# Altium PCB MicrophoneArray.Main.PcbDoc
Units mm, origin at the board's own origin, x right, y up, seen from the top; angles counter-clockwise.
Board outline 40 x 84 mm, 2 copper layers (Top Layer, Bottom Layer); 51 components, 49 nets, 162 pads, 157 vias.
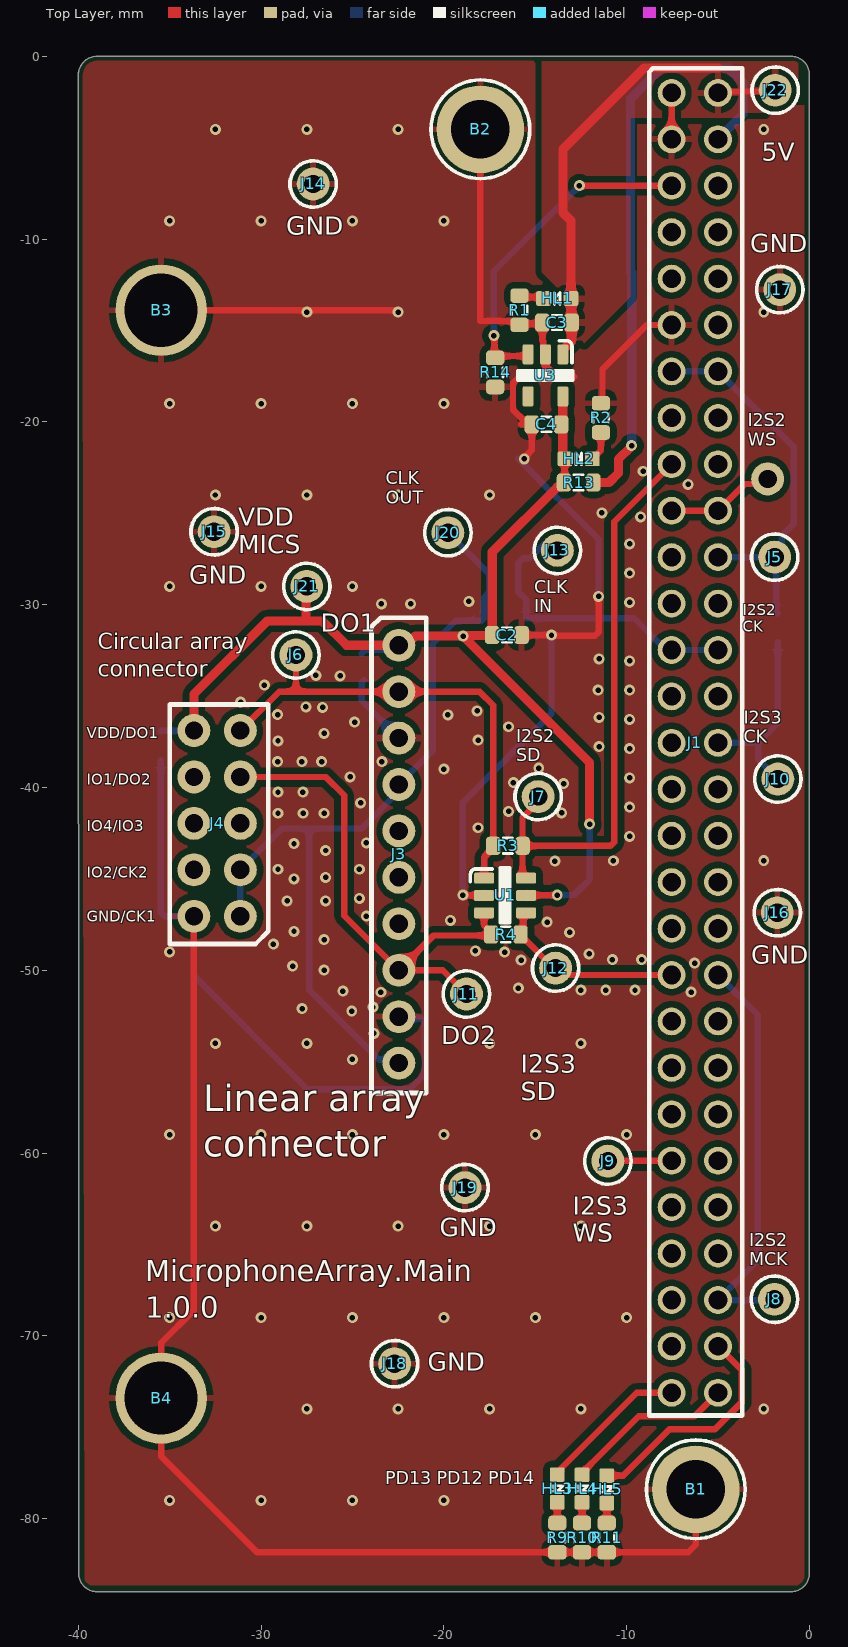
[diagram p0: Top Layer view]
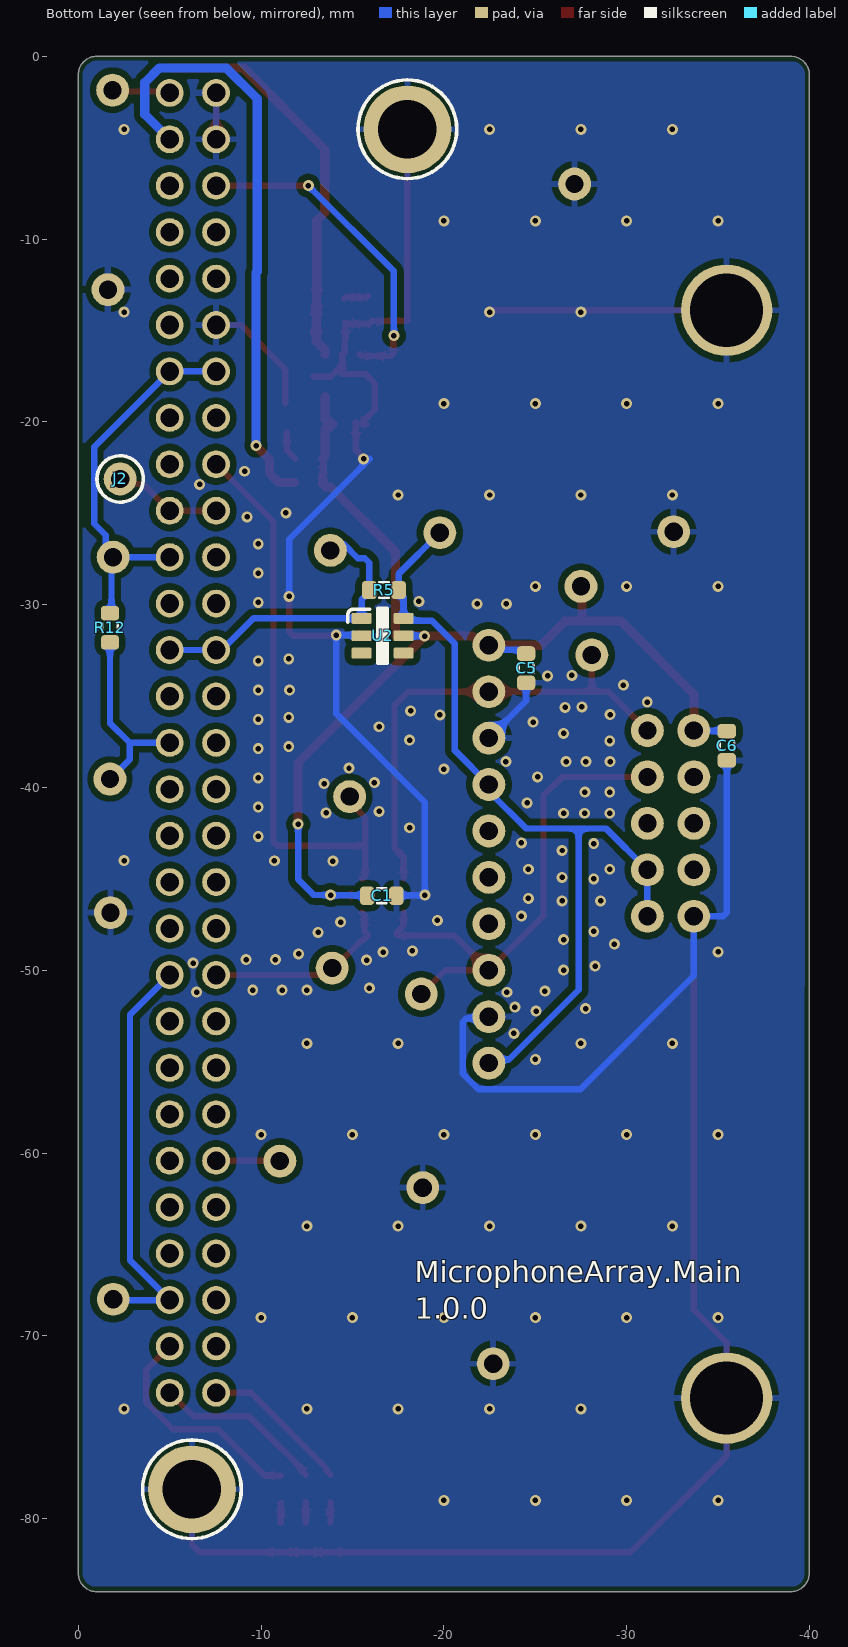
[diagram p1: Bottom Layer view, seen from below]
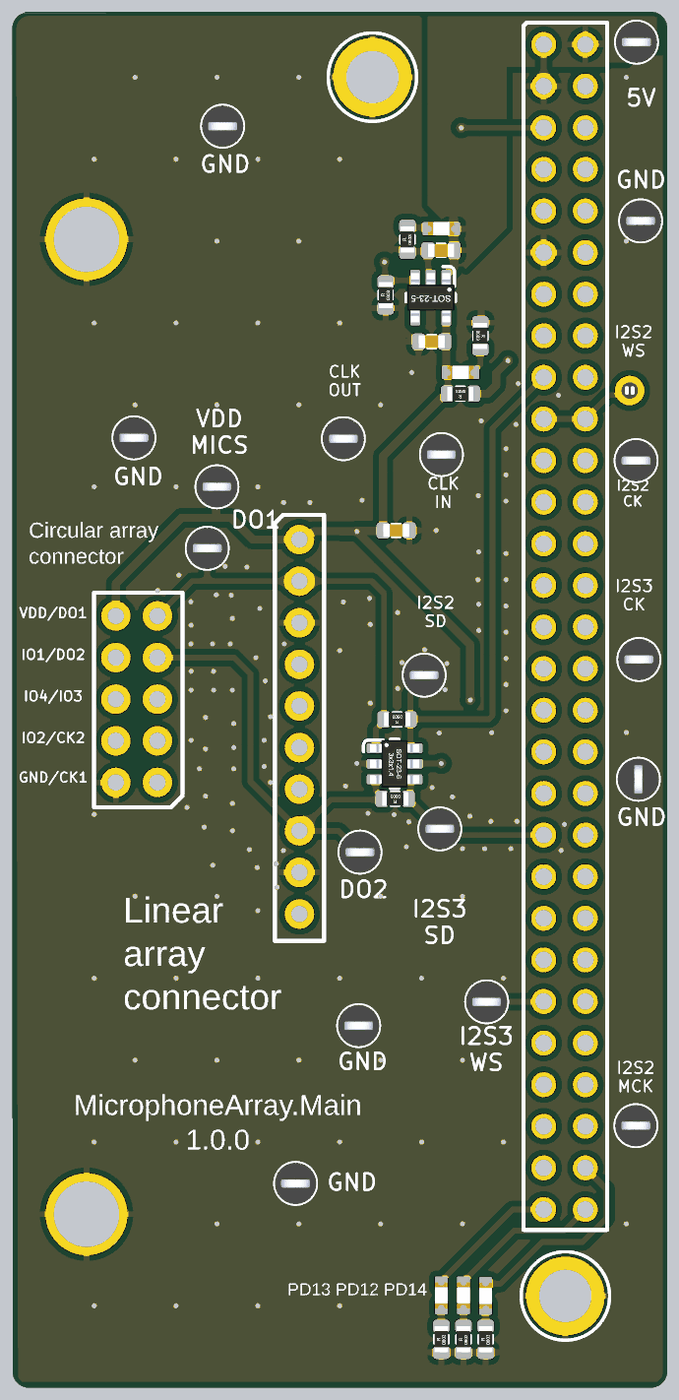
[diagram p2: 3D render of the assembled board from above, using the file's embedded part models]
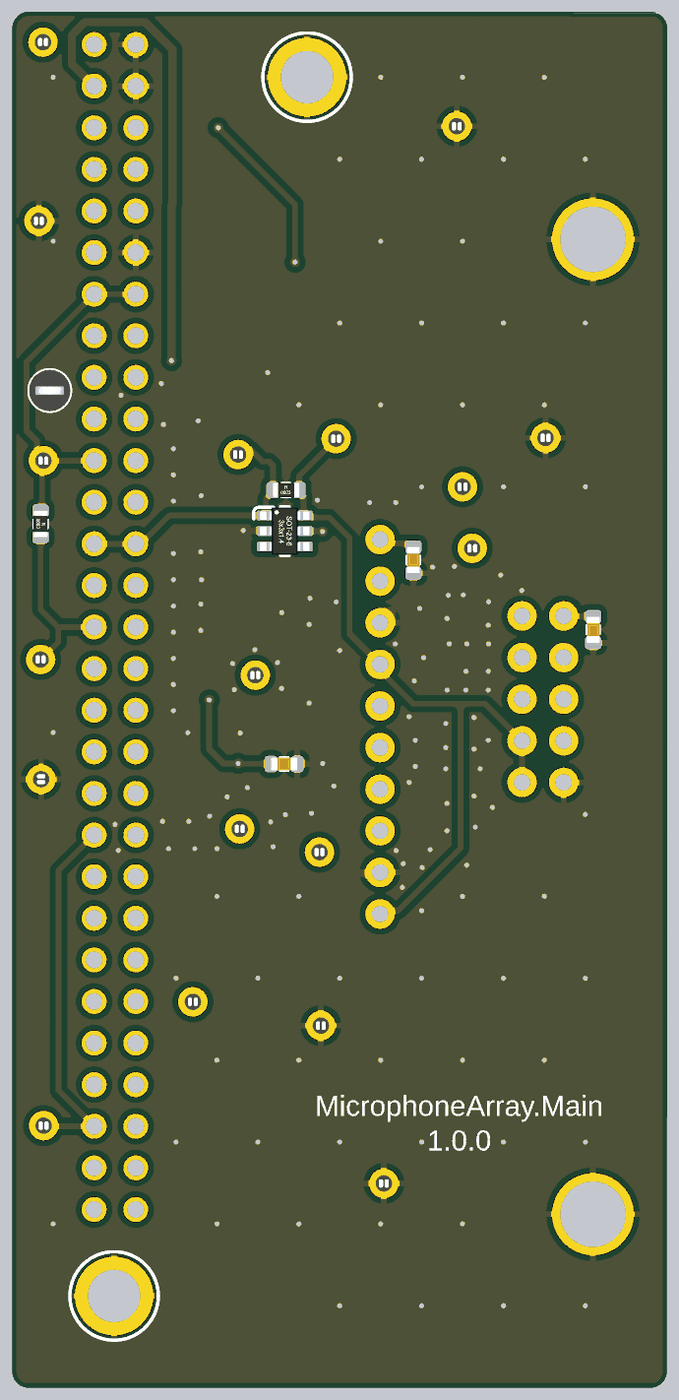
[diagram p3: 3D render of the assembled board from below, using the file's embedded part models]

## Layer stack, top to bottom
Top Solder: solder mask 0.0102, Solder Resist, Dk 3.5
Top Layer: signal copper 0.0356
Dielectric 1: dielectric 0.32, FR-4, Dk 4.8
Bottom Layer: signal copper 0.0356
Bottom Solder: solder mask 0.0102, Solder Resist, Dk 3.5

## Board outline
-39.981,-83 ccw(c-38.981,-83) -38.981,-84 -1,-84 ccw(c-1,-83) 0,-83 0,-1 ccw(c-1,-1) -1,0 -38.951,0 ccw(c-38.976,-1.025) -40,-1

## Design rules (kind name [scope] priority, off if disabled: settings)
AcuteAngle [All] p1: minimum=3.50000000000000E+0001 checktracksonly=FALSE
BoardOutlineClearance "BoardOutlineClearance 1" [All] p1: gap=0.25 ignorepadtopadclearanceinfootprint=FALSE except(0: Arc-SplitContinuation Track-SplitContinuation SMDPad-SplitContinuation THPad-SplitContinuation Via-SplitContinuation Fill-SplitContinuation Poly-SplitContinuation Region-SplitContinuation Text-SplitContinuation) // Milling
BoardOutlineClearance "BoardOutlineClearance 2" [All] p2: gap=0.4 ignorepadtopadclearanceinfootprint=FALSE except(0: Arc-SplitContinuation Track-SplitContinuation SMDPad-SplitContinuation THPad-SplitContinuation Via-SplitContinuation Fill-SplitContinuation Poly-SplitContinuation Region-SplitContinuation Text-SplitContinuation) // V-Cut
Clearance "Clearance 3 Oz" [All] p1: gap=0.35 ignorepadtopadclearanceinfootprint=FALSE except(0.25: Arc-Hole Track-Hole SMDPad-Hole THPad-Hole Via-Hole Fill-Hole Poly-Hole Region-Hole Text-Hole)
Clearance "Clearance 2 Oz" [All] p2: gap=0.3 ignorepadtopadclearanceinfootprint=FALSE except(0.25: Arc-Hole Track-Hole SMDPad-Hole THPad-Hole Via-Hole Fill-Hole Poly-Hole Region-Hole Text-Hole)
Clearance "Clearance-1 1 Oz" [All] p3: gap=0.2 ignorepadtopadclearanceinfootprint=FALSE except(0.25: Arc-Hole Track-Hole SMDPad-Hole THPad-Hole Via-Hole Fill-Hole Poly-Hole Region-Hole Text-Hole) // Standart
Clearance "Clearance-2 1 Oz" [All] p4: gap=0.15 ignorepadtopadclearanceinfootprint=FALSE except(0.2: Arc-Fill Arc-Poly Track-Fill Track-Poly SMDPad-Fill SMDPad-Poly THPad-Fill THPad-Poly Via-Fill Via-Poly Fill-Fill Fill-Poly Poly-Poly; 0.25: Arc-Hole Track-Hole SMDPad-Hole THPad-Hole Via-Hole Fill-Hole Poly-Hole Region-Hole Text-Hole) // Advance
Clearance "Clearance-1 1/2 Oz" [All] p5: gap=0.125 ignorepadtopadclearanceinfootprint=FALSE except(0.2: Arc-Fill Arc-Poly Track-Fill Track-Poly SMDPad-SMDPad SMDPad-Fill SMDPad-Poly THPad-Fill THPad-Poly Via-Fill Via-Poly Fill-Fill Fill-Poly Poly-Poly Poly-Region Poly-Text; 0.25: Arc-Hole Track-Hole SMDPad-Hole THPad-Hole Via-Hole Fill-Hole Poly-Hole Region-Hole Text-Hole) // Standart
Clearance "Clearance-2 1/2 Oz" [All] p6: gap=0.1 ignorepadtopadclearanceinfootprint=FALSE except(0.15: Arc-Fill Arc-Poly Track-Fill Track-Poly SMDPad-SMDPad SMDPad-Fill SMDPad-Poly THPad-Fill THPad-Poly Via-Fill Via-Poly Fill-Fill Fill-Poly Poly-Poly Poly-Region Poly-Text; 0.25: Arc-Hole Track-Hole SMDPad-Hole THPad-Hole Via-Hole Fill-Hole Poly-Hole Region-Hole Text-Hole) // Advance
DiffPairsRouting "DiffPairsRouting 1 Oz" [All] p1: maxlimit=0.254 minlimit=0.2 mostfreqgap=0.254 toplayer_minwidth=0.2 toplayer_maxwidth=0.381 toplayer_prefwidth=0.381 bottomlayer_minwidth=0.2 bottomlayer_maxwidth=0.381 bottomlayer_prefwidth=0.381 maxuncoupledlength=12.7
DiffPairsRouting "DiffPairsRouting 1/2 Oz" [All] p2: maxlimit=0.254 minlimit=0.1 mostfreqgap=0.254 toplayer_minwidth=0.1 toplayer_maxwidth=0.381 toplayer_prefwidth=0.381 bottomlayer_minwidth=0.1 bottomlayer_maxwidth=0.381 bottomlayer_prefwidth=0.381 maxuncoupledlength=12.7
HoleSize "Minimum HoleSize" [IsPad] p1: absolutevalues=TRUE maxlimit=5.9 minlimit=0.6 maxpercent=80.000 minpercent=20.000
HoleSize "Minimum HoleSize VIA 1" [IsVia] p2: absolutevalues=TRUE maxlimit=5.9 minlimit=0.3 maxpercent=80.000 minpercent=20.000 // Standart
HoleSize "Minimum HoleSize VIA 2" [IsVia] p3: absolutevalues=TRUE maxlimit=5.9 minlimit=0.2 maxpercent=80.000 minpercent=20.000 // Advance
HoleToHoleClearance Hole2HoleClearance [All] p1: gap=0.25 allowstackedmicrovias=FALSE
MinimumAnnularRing "Minimum AR VIA Standart" [IsVia] p1: minimumring=0.15
MinimumAnnularRing "Minimum AR PAD Standart" [IsPAD] p2: minimumring=0.2
MinimumAnnularRing "Minimum AR VIA Advance" [IsVia] p3: minimumring=0.1
MinimumAnnularRing "Minimum AR PAD Advance" [IsPAD] p4: minimumring=0.15
MinimumSolderMaskSliver "SolderMask Bridge Standart" [All] p1: minsoldermaskwidth=0.15 // All Masks
MinimumSolderMaskSliver "SolderMask Bridge Advance" [All] p2: minsoldermaskwidth=0.1 // Mask LDI
PlaneClearance "PlaneClearance 3 Oz" [All] p1: clearance=0.35
PlaneClearance "PlaneClearance 2 Oz" [All] p2: clearance=0.3
PlaneClearance "PlaneClearance 1 Oz" [All] p3: clearance=0.2
PlaneClearance "PlaneClearance-1 1/2 Oz" [All] p4: clearance=0.2 // Standart
PlaneClearance "PlaneClearance-2 1/2 Oz" [All] p5: clearance=0.15 // Advance
PlaneConnect "TermalConnect 3 Oz" [All] p1: planeconnectstyle=Relief reliefexpansion=0.2 reliefentries=4 reliefconductorwidth=0.35 reliefairgap=0.35 // Standart
PlaneConnect "TermalConnect 2 Oz" [All] p2: planeconnectstyle=Relief reliefexpansion=0.2 reliefentries=4 reliefconductorwidth=0.3 reliefairgap=0.3 // Standart
PlaneConnect "TermalConnect-1 1 Oz" [All] p3: planeconnectstyle=Relief reliefexpansion=0.2 reliefentries=4 reliefconductorwidth=0.2 reliefairgap=0.2 // Standart
PlaneConnect "TermalConnect-2 1 Oz" [All] p4: pad.planeconnectstyle=Relief pad.reliefexpansion=0.15 pad.reliefentries=4 pad.reliefconductorwidth=0.2 pad.reliefairgap=0.2 via.planeconnectstyle=Direct via.reliefexpansion=0.15 via.reliefentries=4 via.reliefconductorwidth=0.15 via.reliefairgap=0.15 // Advance
PlaneConnect "TermalConnect-1 1/2 Oz" [All] p5: planeconnectstyle=Relief reliefexpansion=0.2 reliefentries=4 reliefconductorwidth=0.2 reliefairgap=0.2 // Standart
PlaneConnect "TermalConnect-2 1/2 Oz" [All] p6: pad.planeconnectstyle=Relief pad.reliefexpansion=0.15 pad.reliefentries=4 pad.reliefconductorwidth=0.15 pad.reliefairgap=0.15 via.planeconnectstyle=Direct via.reliefexpansion=0.15 via.reliefentries=4 via.reliefconductorwidth=0.15 via.reliefairgap=0.15 // Advance
PolygonConnect "PolygonConnect 3 Oz" [All] p1: thpad.connectstyle=Relief thpad.reliefconductorwidth=0.35 thpad.reliefentries=4 thpad.polygonreliefangle="90 Angle" thpad.airgapwidth=0.35 smdpad.connectstyle=Relief smdpad.reliefconductorwidth=0.35 smdpad.reliefentries=4 smdpad.polygonreliefangle="90 Angle" smdpad.airgapwidth=0.35 via.connectstyle=Direct via.reliefconductorwidth=0.254 via.reliefentries=4 via.polygonreliefangle="90 Angle" via.airgapwidth=0.254
PolygonConnect "PolygonConnect 2 Oz" [All] p2: thpad.connectstyle=Relief thpad.reliefconductorwidth=0.3 thpad.reliefentries=4 thpad.polygonreliefangle="90 Angle" thpad.airgapwidth=0.3 smdpad.connectstyle=Relief smdpad.reliefconductorwidth=0.3 smdpad.reliefentries=4 smdpad.polygonreliefangle="90 Angle" smdpad.airgapwidth=0.3 via.connectstyle=Direct via.reliefconductorwidth=0.254 via.reliefentries=4 via.polygonreliefangle="90 Angle" via.airgapwidth=0.254
PolygonConnect "PolygonConnect-1 1 Oz" [All] p3: thpad.connectstyle=Relief thpad.reliefconductorwidth=0.2 thpad.reliefentries=4 thpad.polygonreliefangle="90 Angle" thpad.airgapwidth=0.2 smdpad.connectstyle=Relief smdpad.reliefconductorwidth=0.2 smdpad.reliefentries=4 smdpad.polygonreliefangle="90 Angle" smdpad.airgapwidth=0.2 via.connectstyle=Direct via.reliefconductorwidth=0.254 via.reliefentries=4 via.polygonreliefangle="90 Angle" via.airgapwidth=0.254 // Standart
PolygonConnect "PolygonConnect-2 1 Oz" [All] p4: thpad.connectstyle=Relief thpad.reliefconductorwidth=0.15 thpad.reliefentries=4 thpad.polygonreliefangle="90 Angle" thpad.airgapwidth=0.15 smdpad.connectstyle=Relief smdpad.reliefconductorwidth=0.15 smdpad.reliefentries=4 smdpad.polygonreliefangle="90 Angle" smdpad.airgapwidth=0.15 via.connectstyle=Direct via.reliefconductorwidth=0.254 via.reliefentries=4 via.polygonreliefangle="90 Angle" via.airgapwidth=0.254 // Advance
PolygonConnect "PolygonConnect-1 1/2 Oz" [All] p5: thpad.connectstyle=Relief thpad.reliefconductorwidth=0.15 thpad.reliefentries=4 thpad.polygonreliefangle="90 Angle" thpad.airgapwidth=0.2 smdpad.connectstyle=Relief smdpad.reliefconductorwidth=0.2 smdpad.reliefentries=4 smdpad.polygonreliefangle="90 Angle" smdpad.airgapwidth=0.2 via.connectstyle=Direct via.reliefconductorwidth=0.254 via.reliefentries=4 via.polygonreliefangle="90 Angle" via.airgapwidth=0.254 // Standart
PolygonConnect "PolygonConnect-2 1/2 Oz" [All] p6: thpad.connectstyle=Relief thpad.reliefconductorwidth=0.125 thpad.reliefentries=4 thpad.polygonreliefangle="90 Angle" thpad.airgapwidth=0.15 smdpad.connectstyle=Relief smdpad.reliefconductorwidth=0.125 smdpad.reliefentries=4 smdpad.polygonreliefangle="90 Angle" smdpad.airgapwidth=0.15 via.connectstyle=Direct via.reliefconductorwidth=0.254 via.reliefentries=4 via.polygonreliefangle="90 Angle" via.airgapwidth=0.254 // Advance
RoomDefinition RoomDefinition_1 [InComponentClass('Room Definition 2') vs False] p1: confinementstyle=ConfineIn formatcopy=TRUE lockcomponents=FALSE outline -21.058,-81.452 -3.164,-81.452 -3.164,-0.278 -21.058,-0.278
RoomDefinition [InComponentClass('Room Definition 1') vs False] p2: confinementstyle=ConfineIn formatcopy=TRUE lockcomponents=FALSE outline -38.271,-76.213 -20.581,-76.213 -20.581,-11.087 -38.271,-11.087
RoutingCorners [All] p1 off: cornerstyle=45-Degree minsetback=2.54 maxsetback=2.54
RoutingVias [All] p1: holewidth=0.3 width=0.6 viastyle="Through Hole" minholewidth=0.2 minwidth=0.4 maxholewidth=5.9 maxwidth=6.4
SilkToSilkClearance Silk2SilkClearance [All] p1 off: silktosilkclearance=0.15
SilkToSolderMaskClearance Silk2SolderMaskClearance [IsPad] p1 off: minsilkscreentomaskgap=0.15 clearancetoexposedcopper=TRUE
SolderMaskExpansion SolderMaskExpansion-1 [All] p1: expansion=0.05 istentingtop=FALSE // Standart
SolderMaskExpansion "SolderMaskExpansion LDI" [All] p2: expansion=0.025 istentingtop=FALSE // Advance
UnRoutedNet [All] p1: checkbadconnections=TRUE
Width "Width 3 Oz" [All] p1: maxlimit=10 minlimit=0.35 preferedwidth=0.4 checkconnectedcopper=TRUE
Width "Width 2 Oz" [All] p2: maxlimit=10 minlimit=0.3 preferedwidth=0.35 minimp=50.000000 maximp=50.000000 favimp=50.000000 checkconnectedcopper=TRUE
Width "Width 1 Oz" [All] p3: maxlimit=0.5 minlimit=0.15 preferedwidth=0.2 checkconnectedcopper=TRUE
Width "Width 1/2 Oz" [All] p4: maxlimit=10 minlimit=0.1 preferedwidth=0.125 checkconnectedcopper=TRUE
20 further rules are at their usual default settings.

## Components (designator, comment, footprint, x,y, rotation, side; value= is the part's Value field where it differs from the comment)
B1 "M3" M3_Plated_Hole_NO_3D -6.218,-78.398 r0 top locked
B2 "M3" M3_Plated_Hole_NO_3D -18.004,-3.991 r0 top locked
B3 "M4" M4 -35.466,-13.891 r0 top locked
B4 "M4" M4 -35.466,-73.409 r0 top locked
C1 "1uF" CAP_0603 -16.603,-45.925 r0 bottom
C2 "1uF" CAP_0603 -16.554,-31.662 r180 top
C3 "1uF" CAP_0603 -13.814,-14.564 r0 top
C4 "1uF" CAP_0603 -14.389,-20.138 r0 top
C5 "NC" CAP_0603 -24.5,-33.475 r90 bottom
C6 "NC" CAP_0603 -35.48,-37.721 r270 bottom
HL1 "Color" LED_0603 -13.798,-13.249 r180 top
HL2 "Color" LED_0603 -12.625,-22.024 r0 top
HL3 "Color" LED_0603 -13.796,-78.357 r270 top
HL4 "Color" LED_0603 -12.441,-78.357 r270 top
HL5 "Color" LED_0603 -11.086,-78.398 r270 top
J1 "PDB-58" PBD-58 -6.27,-37.56 r270 top locked
J2 "5001" 5001 -2.288,-23.122 r180 bottom
J3 "PBS-10" PBS-10 -22.462,-43.65 r270 top locked
J4 "NC(PDB-10)" PDB-10 -32.405,-41.966 r90 top locked
J5 "5001" 5001 -1.902,-27.4 r0 top
J6 "5001" 5001 -28.093,-32.754 r0 top
J7 "5001" 5001 -14.843,-40.5 r0 top
J8 "5001" 5001 -1.913,-68 r0 top
J9 "5001" 5001 -11.027,-60.441 r0 top
J10 "5001" 5001 -1.731,-39.541 r0 top
J11 "5001" 5001 -18.764,-51.302 r0 top
J12 "5001" 5001 -13.888,-49.884 r0 top
J13 "5001" 5001 -13.79,-27.032 r0 top
J14 "5001" 5001 -27.152,-6.985 r0 top
J15 "5001" 5001 -32.571,-26.011 r0 top
J16 "5001" 5001 -1.761,-46.851 r270 top
J17 "5001" 5001 -1.624,-12.765 r0 top
J18 "5001" 5001 -22.697,-71.527 r0 top
J19 "5001" 5001 -18.844,-61.894 r0 top
J20 "5001" 5001 -19.779,-26.063 r0 top
J21 "5001" 5001 -27.5,-29 r0 top
J22 "5001" 5001 -1.875,-1.854 r0 top
R1 "Resistance" RES_0603 -15.864,-13.893 r90 top
R2 "Resistance" RES_0603 -11.409,-19.78 r270 top
R3 "Resistance" RES_0603 -16.497,-43.195 r180 top
R4 "Resistance" RES_0603 -16.615,-48.049 r180 top
R5 "Resistance" RES_0603 -16.721,-29.198 r180 bottom
R9 "Resistance" RES_0603 -13.796,-81.043 r90 top
R10 "Resistance" RES_0603 -12.441,-81.043 r90 top
R11 "Resistance" RES_0603 -11.086,-81.043 r90 top
R12 "Resistance" RES_0603 -1.731,-31.264 r270 bottom
R13 "Resistance" RES_0603 -12.625,-23.317 r180 top
R14 "Resistance" RES_0603 -17.196,-17.291 r90 top
U1 "NC(SN74LVC2G17)" SOT23-6 -16.649,-45.91 r0 top
U2 "NC(SN74LVC2G17)" SOT23-6 -16.646,-31.701 r180 bottom
U3 "RS3007-x.xASYF5" SOT23-5 -14.444,-17.456 r270 top

## Footprints (in the part's own frame and the unit in brackets; to place one, negate y for a bottom-side part, rotate by r counter-clockwise, add the part's x,y. Pads: shape width x height; smd on the part's side, far side on the other; paste and mask are expansions set on the pad)
5001 [mm] "Keystone Electronics, Black PC Test Point, Miniature Phosphor Bronze Silver Plating Through Hole Mounting Type"
  round 1.8 hole 1: 1(0,0)
  silkscreen extent -1.27,-1.27 1.27,1.27, body extent -1.27,-1.27 1.27,1.27, height 4.57
CAP_0603 [mm]
  rrect50% 0.8x1 smd: 1(-0.8,0) 2(0.8,0)
  silkscreen extent -0.25,-0.4 0.25,0.4, body extent -0.8,-0.4 0.8,0.4, height 0.8
LED_0603 [mm]
  rrect20% 0.8x0.8 smd: 1(-0.75,0) 2(0.75,0)
  silkscreen extent -0.15,-0.33 0.15,0.33, body extent -0.8,-0.4 0.8,0.4, height 0.8
M3_Plated_Hole_NO_3D [mm] "Machine Screw, M3"
  round 4.8 hole 3.2: 1(0,0)
  silkscreen extent -2.7,-2.7 2.7,2.7
M4 [mm]
  round 5 hole 4: 1(0,0)
PBD-58 [mil]
  round 60 hole 40.16: 1(-1400,-50) 2(-1400,50) 3(-1300,-50) 4(-1300,50) 5(-1200,-50) 6(-1200,50) 7(-1100,-50) 8(-1100,50) 9(-1000,-50) 10(-1000,50) 11(-900,-50) 12(-900,50) 13(-800,-50) 14(-800,50) 15(-700,-50) 16(-700,50) 17(-600,-50) 18(-600,50) 19(-500,-50) 20(-500,50) 21(-400,-50) 22(-400,50) 23(-300,-50) 24(-300,50) 25(-200,-50) 26(-200,50) 27(-100,-50) 28(-100,50) 29(0,-50) 30(0,50) 31(100,-50) 32(100,50) 33(200,-50) 34(200,50) 35(300,-50) 36(300,50) 37(400,-50) 38(400,50) 39(500,-50) 40(500,50) 41(600,-50) 42(600,50) 43(700,-50) 44(700,50) 45(800,-50) 46(800,50) 47(900,-50) 48(900,50) 49(1000,-50) 50(1000,50) 51(1100,-50) 52(1100,50) 53(1200,-50) 54(1200,50) 55(1300,-50) 56(1300,50) 57(1400,-50) 58(1400,50)
  silkscreen extent -1453,-98 1449,102
PBS-10 [mm]
  round 1.8 hole 1: 1(-11.43,0) 2(-8.89,0) 3(-6.35,0) 4(-3.81,0) 5(-1.27,0) 6(1.27,0) 7(3.81,0) 8(6.35,0) 9(8.89,0) 10(11.43,0)
  silkscreen extent -12.93,-1.5 13.07,1.5
PDB-10 [mm]
  round 1.8 hole 1: 1(-5.08,-1.27) 2(-5.08,1.27) 3(-2.54,-1.27) 4(-2.54,1.27) 5(0,-1.27) 6(0,1.27) 7(2.54,-1.27) 8(2.54,1.27) 9(5.08,-1.27) 10(5.08,1.27)
  silkscreen extent -6.6,-2.8 6.5,2.6
RES_0603 [mm] "0.1W"
  rrect50% 0.8x1 smd: 1(-0.8,0) 2(0.8,0)
  silkscreen extent -0.25,-0.43 0.25,0.43, body extent -0.8,-0.42 0.8,0.43, height 0.45
SOT23-5 [mm] "SOT23, 5-Leads, Body 3,0x2,8mm (max), Pitch 0,95mm, IPC Medium Density"
  rrect30% 1.1x0.6 smd: 1(-1.15,0.95) 2(-1.15,0) 3(-1.15,-0.95) 4(1.15,-0.95) 5(1.15,0.95)
  silkscreen extent -1.9,-1.5 0.25,1.5, body extent -1.5,-1.45 1.5,1.45, height 1.45
SOT23-6 [mm]
  rrect30% 1.1x0.6 smd: 1(-1.15,0.95) 2(-1.15,0) 3(-1.15,-0.95) 4(1.15,-0.95) 5(1.15,0) 6(1.15,0.95)
  silkscreen extent -1.9,-1.5 0.25,1.5, body extent -1.5,-1.45 1.5,1.45, height 1.45

## Part data
B1 B2: "Machine Screw, M3"
C1 C2 C3 C4 C5 C6: library part Capacitor_Non-polar
HL1 HL2 HL3 HL4 HL5: library part SMD_LED
J2 J5 J6 J7 J8 J9 J10 J11 J12 J13 J14 J15 J16 J17 J18 J19 J20 J21 J22: library part Test_Point
J4: library part PDB-10
R1 R2 R3 R4 R5 R9 R10 R11 R12 R13 R14: library part Resistor
U1 U2: library part SN74LVC2G17, "Dual Schmitt-Trigger Buffer"
U3: library part RS3007-x.x(A)SYF5, "LDO, Vin < 45V, 300mA  xx _Is_Voltage (A)-is1%"

## Via types
v1: diameter 0.6, hole 0.3, Top Layer to Bottom Layer, 157 vias

## Nets (pads, with @x,y where several pads share a name; then routed paths per layer and width w, separated by ;. In a path a pad name is that pad's centre, name@x,y a point inside that pad or via, vN(x,y) a via of type N, cw(c..) or ccw(c..) an arc to the next point about the centre after c; other vN are vias at no path point)
3V3: J1.4 R13.1 | length 33.2
  Top Layer w0.5: R13.1 -10.965,-23.317 -10.451,-22.804 -10.451,-22.053 -9.725,-21.327 v1(-9.725,-21.3)
  Bottom Layer w0.5: v1(-9.725,-21.3) -9.725,-11.832 -9.791,-11.766 -9.791,-2.325 -8.104,-0.638 -4.436,-0.638 -3.638,-1.436 -3.638,-3.178 J1.4
+5V: C3.2 HL1.1 J1.2 J22.1 U3.1 | length 25.1
  Top Layer w0.35: J1.2 -4.927,-1.927 -1.948,-1.927 J22.1
  Top Layer w0.5: U3.1 -13.494,-16.056 -13.369,-15.931 -13.356,-15.931 -13.014,-15.589 C3.2 -13.031,-14.547 -13.031,-13.266 HL1.1 -13.048,-8.988 -13.482,-8.554 -13.482,-5.082 -9.038,-0.638 -5,-0.638
CK1: J3.4 J3.10 J4.1 J4.3 J20.1 R5.2 U2.6 | length 46
  Bottom Layer w0.35: J4.1 J4.3 -28.874,-42.245 -27.375,-42.245 ; J3.10 -22.666,-54.876 -23.574,-54.876 -27.375,-51.075 -27.375,-42.245 ; J3.4@-22.462,-40.207 -24.5,-42.245 -27.375,-42.245 ; J3.4 -20.605,-37.983 -20.605,-32.131 -19.35,-30.876 -17.921,-30.876 U2.6 -17.796,-29.587 -17.521,-29.312 R5.2 -17.521,-28.321 J20.1
DO1: J3.2 J4.9 J6.1 R3.2 U1.1 | length 26.7
  Top Layer w0.35: J4.9 -29.009,-34.76 -28.093,-34.76 ; J6.1 -28.093,-34.76 ; U1.1 -17.799,-43.811 -17.297,-43.309 R3.2 -17.297,-35.51 -18.047,-34.76 -28.093,-34.76
DO2: J3.8 J4.7 J11.1 R4.2 U1.3 | length 28.3
  Top Layer w0.35: J4.7 -26.46,-39.426 -25.451,-40.435 -25.451,-47.011 J3.8 ; J11.1 -20.066,-50 J3.8 ; U1.3 -17.799,-47.551 -17.415,-47.935 R4.2 -17.469,-48.103 -20.565,-48.103 J3.8
GND: B1.1 B2.1 B3.1 B4.1 C1.1 C2.1 C3.1 C4.1 C5.1 C6.2 J1.1 J1.3 J1.11 J3.3 J3.9 J4.2 J14.1 J15.1 J16.1 J17.1 J18.1 J19.1 R1.1 R2.1 R9.1 R10.1 R11.1 R14.1 U1.2 U2.2 U3.2 | length 186
  Top Layer w0.35: B3.1 v1@-22.5,-13.891 ; J4.2 -33.675,-68.593 -35.466,-70.384 B4.1 -35.466,-76.604 -30.227,-81.843 R9.1 R10.1 R11.1 -6.633,-81.843 -6.218,-81.428 B1.1 ; v1(-18.958,-45.887) -18.947,-45.898 -17.811,-45.898 U1.2 ; B2.1 -18.004,-14.48 -18.007,-14.483 -17.636,-14.483 -17.61,-14.457 -16.914,-14.457 -16.887,-14.483 -16.074,-14.483 R1.1 -15.799,-14.629 -14.679,-14.629 C3.1 -14.614,-15.546 -14.569,-15.591 -14.569,-16.181 U3.2 -14.444,-17.381 -15.709,-17.381 -16.219,-17.891 -16.219,-19.332 C4.1@-15.527,-20.024 ; -15.76,-20.138 C4.1@-15.527,-20.138 ; C2.1 -15.753,-31.663 v1(-14.112,-31.664) v1(-14.112,-31.664) -14.075,-31.701 -11.741,-31.701 -11.536,-31.496 -11.536,-29.59 -11.56,-29.566 v1(-11.536,-29.542) ; v1(-15.603,-22.024) -15.603,-21.957 -15.189,-21.542 C4.1@-15.189,-20.024 ; -14.319,-17.021 -13.809,-17.531 -12.858,-17.531 ; R2.1@-11.322,-18.98 -11.322,-17.116 -8.906,-14.7 J1.11 ; J1.3 J1.1
  Bottom Layer w0.35: C6.2 -35.48,-46.841 -35.275,-47.046 J4.2 -33.675,-50.3 -27.47,-56.505 -21.872,-56.505 -21.037,-55.67 -21.037,-52.84 -21.242,-52.635 -22.367,-52.635 J3.9 ; C5.1@-24.354,-34.129 C5.1 -24.5,-35.262 J3.3 ; C1.1 -17.422,-45.906 -18.939,-45.906 v1(-18.958,-45.887) -18.958,-40.804 -14.112,-35.958 v1(-14.112,-31.664) -15.459,-31.664 U2.2 ; -15.942,-22.024 -11.536,-26.43 v1(-11.536,-29.542)
  other v1: -35,-79 -30,-79 -25,-79 -20,-79 -27.5,-74 -22.5,-74 -17.5,-74 -12.5,-74 -2.5,-74 -35,-69 -30,-69 -25,-69 -20,-69 -15,-69 -10,-69 -32.5,-64 -27.5,-64 -22.5,-64 -17.5,-64 -12.5,-64 -35,-59 -30,-59 -25,-59 -20,-59 -15,-59 -10,-59 -25,-54.876 -32.5,-54 -27.5,-54 -17.5,-54 -12.5,-54 -23.825,-53.45 -25.041,-52.243 -27.75,-52.1 -23.879,-52.014 -23.447,-51.205 -6.474,-51.199 -25.525,-51.149 -12.5,-51.094 -11.144,-51.094 -9.544,-51.094 -15.926,-50.977 -26.55,-50 -28.275,-49.775 -6.277,-49.611 -15.776,-49.452 -10.776,-49.426 -9.176,-49.426 -12.051,-49.102 -35,-49 -16.677,-49.013 -18.276,-48.937 -29.325,-48.575 -26.55,-48.33 -13.12,-47.935 -28.2,-47.88 -14.356,-47.369 -19.643,-47.269 -24.234,-47.046 -28.574,-46.212 -26.475,-46.212 -24.617,-46.075 -28.2,-45.007 -26.475,-44.92 -29.075,-44.475 -24.617,-44.475 -13.923,-44.029 -10.723,-44.01 -2.5,-44 -26.475,-43.45 -28.2,-43.079 -24.234,-43.033 -9.844,-42.673 -18.131,-42.205 -29.075,-41.411 -27.698,-41.411 -26.556,-41.411 -13.563,-41.388 -16.453,-41.314 -9.844,-41.073 -24.55,-40.85 -29.075,-40.26 -27.712,-40.26 -13.453,-39.792 -16.2,-39.734 -9.844,-39.473 -25.125,-39.426 -20,-39 -14.809,-38.942 -29.091,-38.592 -27.772,-38.592 -26.687,-38.592 -23.39,-38.592 -9.844,-37.873 -11.512,-37.765 -29.075,-37.45 -18.131,-37.405 -26.556,-37.037 -16.463,-36.679 -24.888,-36.429 -9.844,-36.273 -11.512,-36.165 -29.091,-36.021 -19.78,-36.03 -18.18,-35.806 -26.628,-35.621 -27.549,-35.594 -31.126,-35.328 -11.56,-34.673 -9.844,-34.673 -29.825,-34.396 -25.675,-33.9 -26.999,-33.863 -9.844,-33.073 -11.512,-32.965 -23.424,-29.961 -21.824,-29.961 -9.844,-29.873 -18.63,-29.822 -35,-29 -30,-29 -25,-29 -9.844,-28.273 -9.844,-26.673 -9.234,-25.194 -11.353,-24.973 -32.5,-24 -27.5,-24 -22.5,-24 -17.5,-24 -6.64,-23.416 -9.1,-22.7 -35,-19 -30,-19 -25,-19 -20,-19 -27.5,-14 -22.5,-14 -2.5,-14 -35,-9 -30,-9 -25,-9 -20,-9 -32.5,-4 -27.5,-4 -22.5,-4 -2.5,-4
I2S2_M_CK: J1.13 J1.14 J1.22 J5.1 R12.1 | length 21.3
  Bottom Layer w0.35: J1.13 J1.14 -0.863,-21.377 -0.863,-25.565 -1.505,-26.207 -1.505,-27.319 -1.607,-27.421 J5.1@-1.881,-27.421 ; J1.22 -4.909,-27.4 -4.898,-27.411 -4.888,-27.4 J5.1 J5.1@-1.881,-27.421 ; R12.1 -1.845,-30.464 -1.816,-30.436 -1.816,-27.485 J5.1@-1.881,-27.421
I2S2_M_MCK: J1.40 J1.54 J8.1 | length 22.7
  Bottom Layer w0.35: J1.40 -2.826,-52.434 -2.826,-65.866 J1.54 -4.993,-68.047 -1.96,-68.047 J8.1
I2S2_M_SD: J1.17 J7.1 R3.1 U1.6 | length 32
  Top Layer w0.35: U1.6 -15.572,-44.96 -15.697,-44.835 R3.1 ; J7.1 -14.843,-40.807 -15.697,-41.661 R3.1 ; J1.17 -10.678,-25.458 -10.678,-42.99 -10.883,-43.195 R3.1
I2S2_M_WS: J1.19 J1.20 J2.1 | length 6.1
  Top Layer w0.35: J1.19 J1.20 -5,-24.559 -4.699,-24.559 -3.539,-23.399 -2.565,-23.399 J2.1
I2S3_S_CK: J1.30 J10.1 R12.2 | length 10.6
  Bottom Layer w0.35: J1.30 -2.805,-37.56 ; J10.1 -2.805,-38.467 -2.805,-37.56 ; R12.2 -1.731,-36.486 -2.805,-37.56
I2S3_S_SD: J1.39 J12.1 R4.1 U1.4 | length 10.6
  Top Layer w0.35: U1.4 -15.532,-46.86 -15.657,-46.985 -15.657,-47.891 R4.1 -15.815,-48.135 -15.592,-48.359 -15.505,-48.359 -13.98,-49.884 -13.496,-49.884 -13.12,-50.26 J1.39
I2S3_S_WS: J1.47 J9.1 | length 3.5
  Top Layer w0.35: J9.1 -11.017,-60.43 -7.55,-60.43 J1.47
NetHL1_2: HL1.2 R1.2 | length 1.4
  Top Layer w0.35: R1.2 -15.786,-13.171 -14.626,-13.171 HL1.2
NetHL2_2: HL2.2 R2.2 | length 1.6
  Top Layer w0.35: HL2.2 -11.409,-21.558 R2.2
NetHL3_2: HL3.2 R9.2 | length 1.1
  Top Layer w0.35: R9.2 HL3.2
NetHL4_2: HL4.2 R10.2 | length 1.1
  Top Layer w0.35: R10.2 HL4.2
NetHL5_2: HL5.2 R11.2 | length 1.1
  Top Layer w0.35: R11.2 HL5.2
PA6: J1.33
PA7: J1.35
PA8: J1.37
PA10: J1.41
PA11: J1.50
PB0: J1.21
PB4: J1.28
PB5: J1.31
PB6: J1.25 J1.26 J13.1 R5.1 U2.1 | length 17.1
  Bottom Layer w0.35: R5.1 -15.921,-29.312 -15.496,-29.737 U2.1 -9.587,-30.751 -8.302,-32.036 -7.858,-32.48 J1.26 ; R5.1 -15.921,-27.7 -15.674,-27.452 -15.293,-27.452 -14.533,-26.692 -14.522,-26.692 -14.182,-27.032 J13.1
PB9: J1.27
PB10: J1.5 R14.2 U3.3 | length 18.7
  Top Layer w0.35: v1(-17.268,-15.282) -17.232,-15.318 -17.232,-16.27 -17.104,-16.399 -15.487,-16.399 U3.3 ; v1(-12.582,-7.08) J1.5 -7.585,-7.125 J1.5@-8.127,-7.125
  Bottom Layer w0.35: v1(-17.268,-15.282) -17.268,-11.766 v1(-12.582,-7.08)
PB11: J1.7
PB14: J1.15
PC7: J1.53
PC8: J1.52
PC9: J1.51
PC10: J1.46
PC11: J1.45
PC12: J1.44
PD3: J1.38
PD7: J1.32
PD12: HL4.1 J1.58 | length 9.4
  Top Layer w0.35: HL4.1 -12.216,-77.382 -12.216,-77.282 -10.132,-75.199 -9.341,-74.407 -6.287,-74.407 J1.58
PD13: HL3.1 J1.57 | length 8.2
  Top Layer w0.35: HL3.1 -13.571,-77.382 -13.571,-77.241 -9.45,-73.12 J1.57
PD14: HL5.1 J1.56 | length 12.6
  Top Layer w0.35: HL5.1 -10.195,-77.648 -7.654,-75.107 -5.167,-75.107 -3.713,-73.653 -3.713,-71.867 J1.56
PD15: J1.55
PE3: J1.16
PE5: J1.12
PE6: J1.10
VBAT: J1.8
VDD_MICS: C1.2 C2.2 C4.2 C5.2 C6.1 HL2.1 J3.1 J4.10 J21.1 R13.2 U1.5 U2.5 U3.5 | length 66.6
  Top Layer w0.35: U1.5 -15.487,-45.898 -13.809,-45.898 v1(-13.798,-45.887) ; R13.2 R13.2@-13.4,-23.292 ; R13.2@-13.4,-23.076 -13.4,-22.049 HL2.1
  Top Layer w0.5: J4.10 -33.675,-34.904 -29.667,-30.896 -27.549,-30.896 ; J21.1 -27.549,-29.049 -27.549,-30.896 ; U3.5 -13.494,-19.888 -13.525,-19.919 -13.708,-19.919 -13.927,-20.138 -13.708,-20.357 -13.525,-20.357 -13.494,-20.388 -13.494,-21.906 HL2.1@-13.382,-22.017 ; R13.2@-13.373,-23.076 -13.373,-23.365 -13.575,-23.567 -13.804,-23.567 -17.354,-27.117 C2.2 -17.386,-31.694 -18.916,-31.694 v1(-18.948,-31.726) ; v1(-12.028,-42.012) -12.028,-38.646 v1(-18.948,-31.726) ; -27.549,-30.896 -26.647,-30.896 -25.323,-32.22 J3.1 -22.07,-32.22 -21.555,-31.705 -20.025,-31.705 -20.014,-31.716 -18.958,-31.716 v1(-18.948,-31.726)
  Bottom Layer w0.35: C6.1 -35.462,-36.903 -33.693,-36.903 J4.10 ; C5.2 -24.29,-32.465 -22.707,-32.465 J3.1 ; v1@-19.006,-31.774 -18.936,-31.703 U2.5@-17.798,-31.703 ; v1(-18.948,-31.726) -18.936,-31.714 -17.809,-31.714 U2.5@-17.798,-31.703 ; U2.5 U2.5@-17.798,-31.703 ; C1.2 -15.784,-45.906 -13.817,-45.906 v1(-13.798,-45.887) -12.883,-45.887 -12.028,-45.032 v1(-12.028,-42.012)
VDDA: J1.9
pads on no net: J1.6 J1.18 J1.23 J1.24 J1.29 J1.34 J1.36 J1.42 J1.43 J1.48 J1.49 J3.5 J3.6 J3.7 J4.4 J4.5 J4.6 J4.8 U2.3 U2.4 U3.4

## Polygon pours and split planes (outlines as drawn)
GND on Top Layer "GND_L01_P002" (solid, pour order 2): -3.376,-0.239 -3.376,-2.621 -0.278,-2.683 -0.278,-3.097 -0.278,-83.651 -39.65,-83.651 -39.818,-0.733 -39.324,-0.239
+5V on Top Layer "+5V_L01_P001" (solid, pour order 1): -3.741,-0.265 -0.625,-0.265 -0.625,-3.097 -3.54,-3.097 -3.832,-3.372 -9.791,-3.372 -9.791,-13.169 -12.314,-15.692 -12.46,-15.546 -13.494,-15.546 -13.494,-12.962 -14.633,-11.823 -14.633,-0.265
GND on Bottom Layer "GND_L02_P000" (solid, remove dead copper, pour order 0): -39.649,-0.294 -39.741,-0.386 -39.741,-83.702 -0.08,-83.702 -0.222,-83.56 -0.222,-0.248

## Silkscreen, mask and mechanical layers (free items; w line width, h text height)
Top Overlay:
  text "5V" at -2.6,-5.725 h1
  text "GND" at -28.618,-9.775 h1
  text "GND" at -3.225,-10.725 h1
  text "I2S2 / WS" at -3.375,-21.3 h0.7
  text "CLK / OUT" at -23.182,-24.475 h0.7
  text "VDD / MICS" at -31.249,-27.175 h1
  text "GND" at -33.93,-28.847 h1
  text "CLK / IN" at -15.058,-30.425 h0.7
  text "DO1" at -26.725,-31.475 h1
  text "I2S2 / CK" at -3.637,-31.475 h0.6
  text "Circular array / connector" at -38.95,-34.25 h1.5
  text "VDD/DO1" at -39.55,-37.307 h0.6
  text "I2S3 / CK" at -3.587,-37.56 h0.7
  text "I2S2 / SD" at -16.049,-38.575 h0.7
  text "IO1/DO2" at -39.55,-39.848 h0.6
  text "IO4/IO3" at -39.55,-42.388 h0.6
  text "IO2/CK2" at -39.55,-44.928 h0.6
  text "GND/CK1" at -39.55,-47.347 h0.6
  text "GND" at -3.189,-49.634 h1
  text "DO2" at -20.144,-54.045 h1
  text "I2S3 / SD" at -15.799,-57.1 h1
  text "Linear array / connector" at -33.175,-60.7 h2.5
  text "GND" at -20.225,-64.556 h1
  text "I2S3 / WS" at -12.947,-64.866 h1
  text "I2S2 / MCK" at -3.293,-66.15 h0.7
  text "MicrophoneArray.Main / 1.0.0" at -36.331,-69.4 h2
  text "GND" at -20.875,-71.925 h1
  text "PD13 PD12 PD14" at -23.196,-78.356 h1.2
Bottom Overlay:
  text "MicrophoneArray.Main / 1.0.0" at -18.419,-69.45 h2
Mechanical 1:
  lines w0.254: -40,-1 cw(c-38.975,-1.025) -38.951,0 -29,0 -1,0 cw(c-1,-1) 0,-1 0,-83 cw(c-1,-83) -1,-84 -29,-84 -38.981,-84 cw(c-38.981,-83) -39.981,-83 -40,-1